# Altium PCB 8266HomeKitSwitch.PcbDoc
Units mm, origin at the board's own origin, x right, y up, seen from the top; angles counter-clockwise.
Board outline 40 x 45 mm, 2 copper layers (Top Layer, Bottom Layer); 19 components, 15 nets, 79 pads, 100 vias.
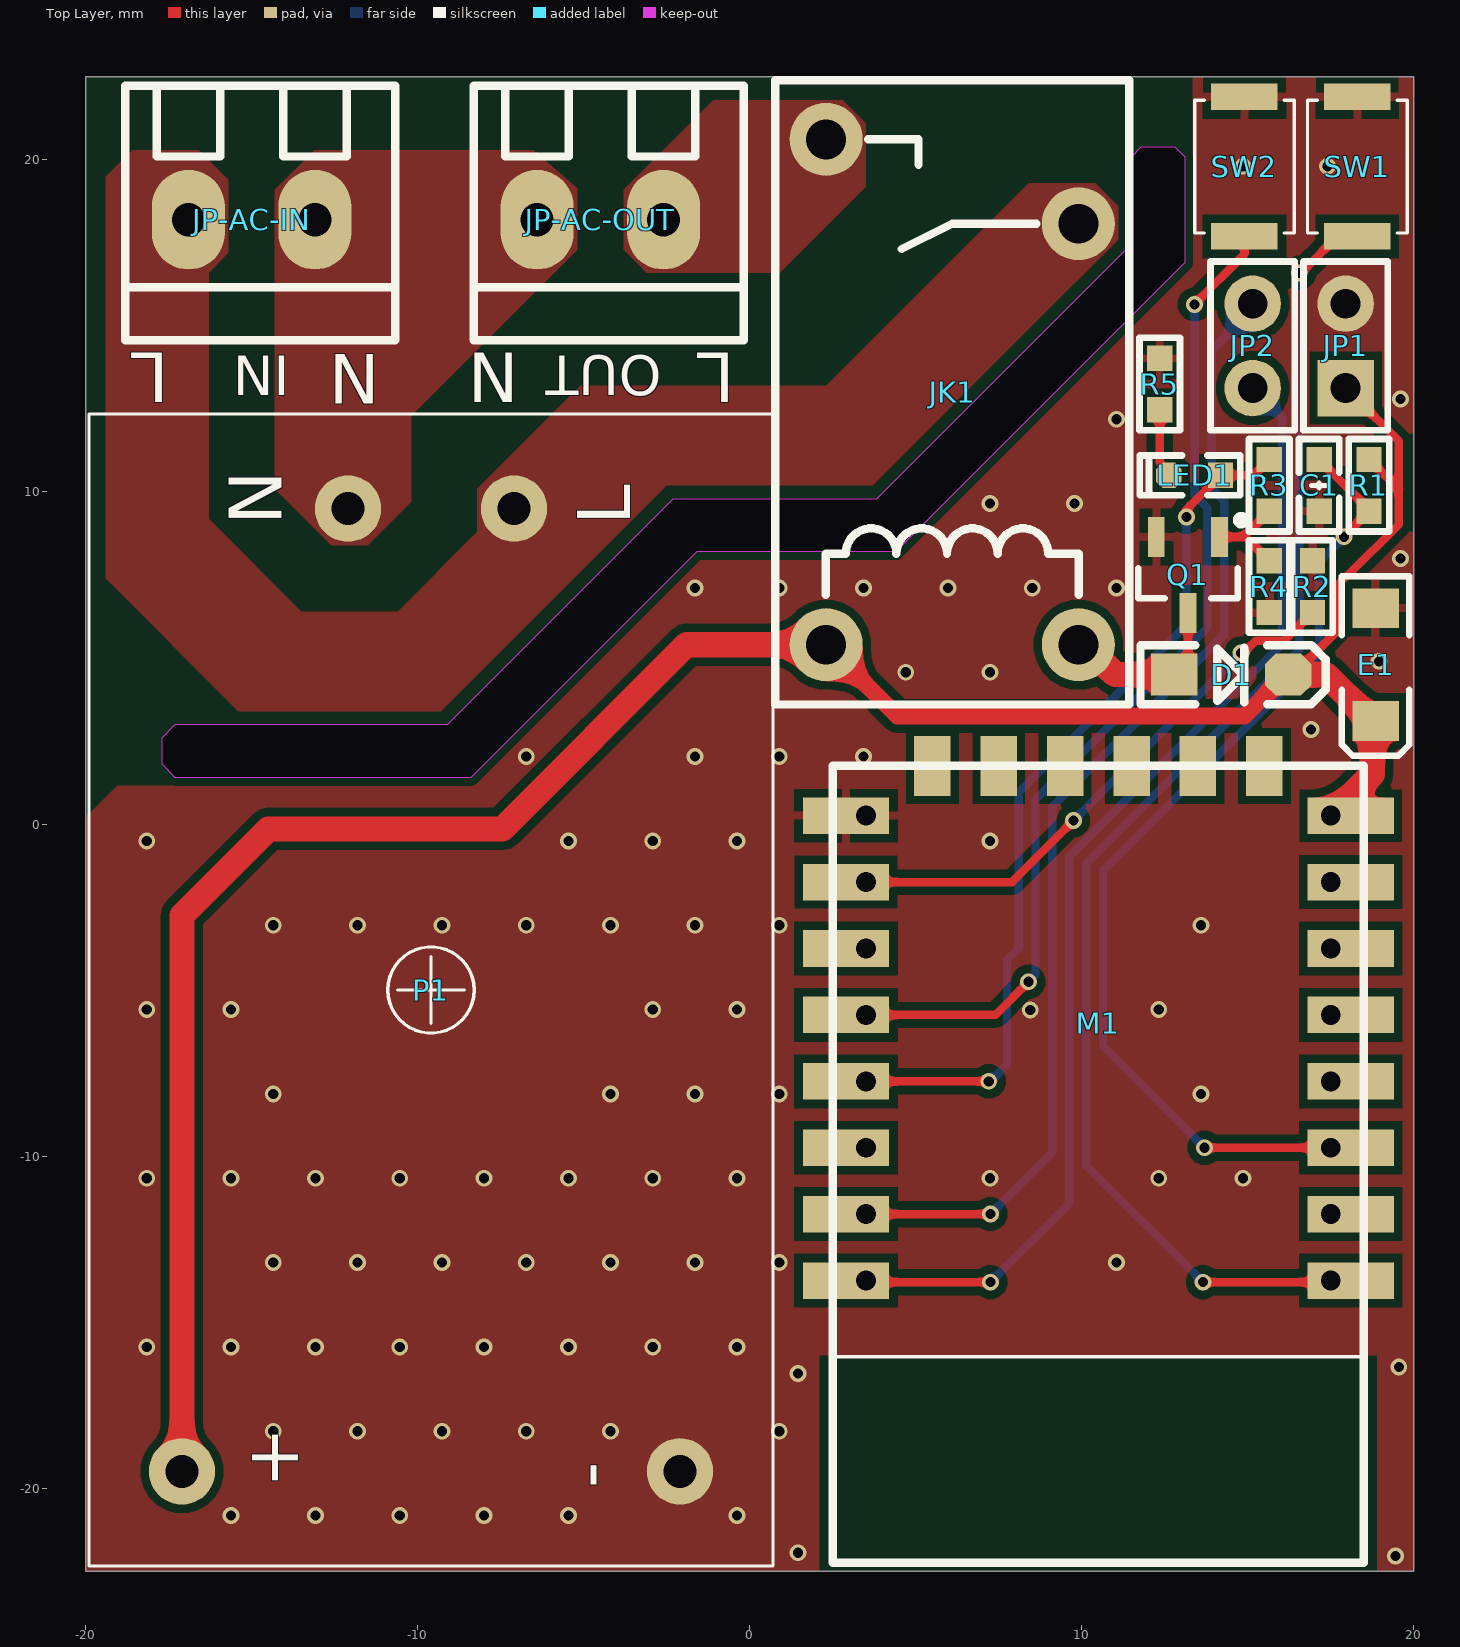
[diagram p0: Top Layer view]
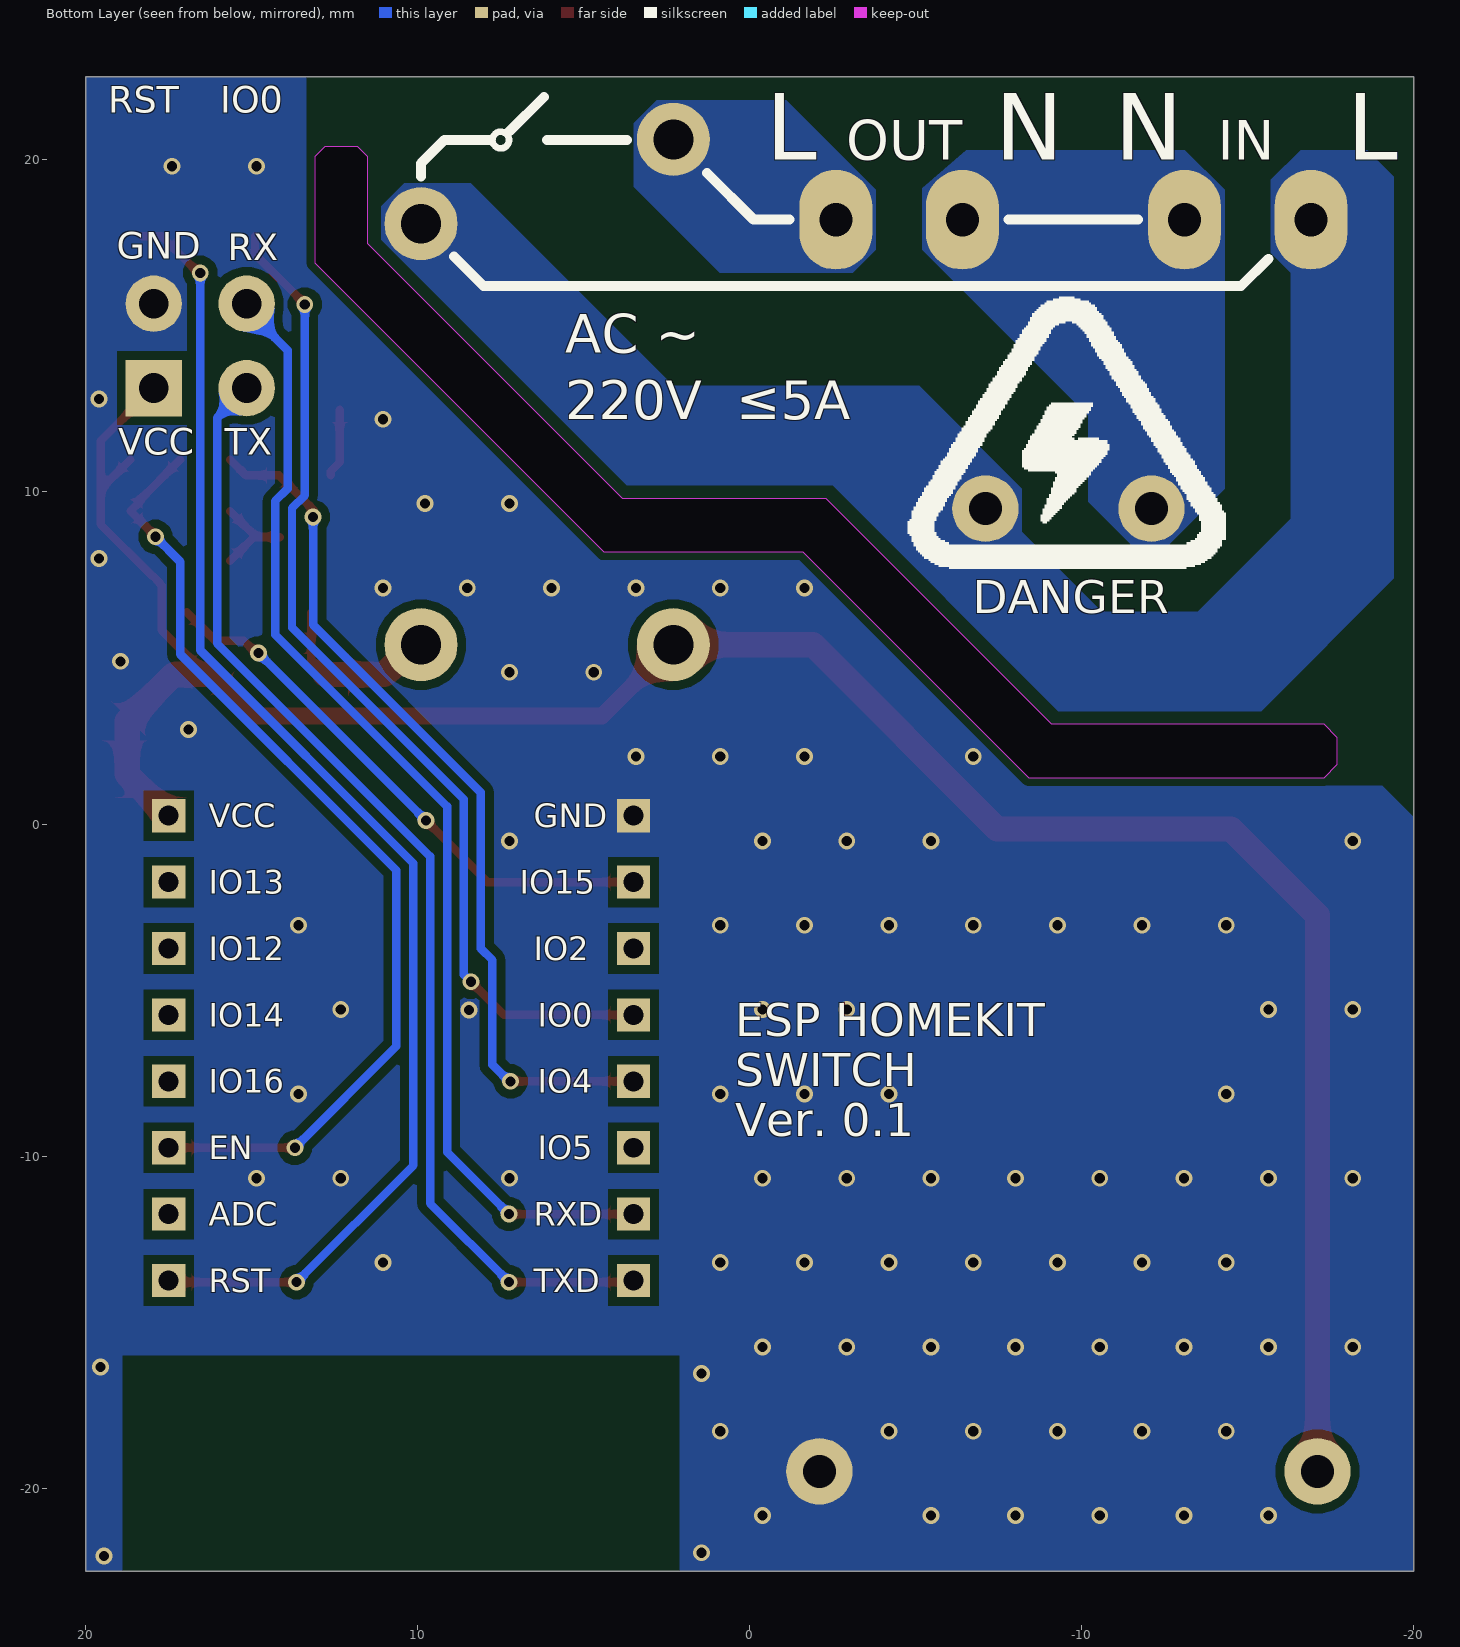
[diagram p1: Bottom Layer view, seen from below]

## Layer stack, top to bottom
Top Solder: solder mask 0.0102, Solder Resist, Dk 3.5
Top Layer: signal copper 0.0356
Dielectric 1: dielectric 0.32, FR-4, Dk 4.8
Bottom Layer: signal copper 0.0356
Bottom Solder: solder mask 0.0102, Solder Resist, Dk 3.5

## Board outline
-20,-22.5 -20,22.5 20,22.5 20,-22.5
cut-out: -17.3,1.4 -17.7,1.8 -17.7,2.6 -17.3,3 -9.1,3 -2.3,9.8 3.831,9.8 11.5,17.469 11.5,20.1 11.8,20.4 12.8,20.4 13.1,20.1 13.1,16.9 4.4,8.2 -1.6,8.2 -8.4,1.4

## Design rules (kind name [scope] priority, off if disabled: settings)
Clearance [All] p1: gap=0.254 ignorepadtopadclearanceinfootprint=FALSE except(0: Arc-Hole Track-Hole SMDPad-Hole THPad-Hole Via-Hole Fill-Hole Poly-Hole Region-Hole Text-Hole)
PolygonConnect [All] p1: thpad.connectstyle=Direct thpad.reliefconductorwidth=0.254 thpad.reliefentries=4 thpad.polygonreliefangle="90 Angle" thpad.airgapwidth=0.254 smdpad.connectstyle=Relief smdpad.reliefconductorwidth=0.254 smdpad.reliefentries=4 smdpad.polygonreliefangle="90 Angle" smdpad.airgapwidth=0.254 via.connectstyle=Direct via.reliefconductorwidth=0.254 via.reliefentries=4 via.polygonreliefangle="90 Angle" via.airgapwidth=0.254
RoutingVias [All] p1: holewidth=0.711 width=1.27 viastyle="Through Hole" minholewidth=0.305 minwidth=0.508 maxholewidth=0.305 maxwidth=0.508
SolderMaskExpansion [All] p1: expansion=0.102 istentingtop=FALSE
Width [All] p1: maxlimit=12.7 minlimit=0.254 preferedwidth=0.254
30 further rules are at their usual default settings.

## Components (designator, comment, footprint, x,y, rotation, side; value= is the part's Value field where it differs from the comment)
C1 "104" "C 0603_L" 17.15,10.2 r90 top
D1 "1N4007" SOD-123 14.5,4.5 r0 top
E1 "100uF/6.3V" "CD A(3216)" 18.85,4.8 r90 top
JK1 "HF32F/5-HS" JZC-32F_1H 6.1,13 r90 top locked
JP1 "HDR-1X2" HDR2.54-LI-2P#1 17.95,14.4 r270 top
JP2 "HDR-1X2" HDR2.54-LI-2P#2 15.15,14.4 r90 top
JP-AC-IN "HDR-1X2" KF128-3.81-2P -15,18.2 r180 top
JP-AC-OUT "HDR-1X2" KF128-3.81-2P -4.5,18.2 r180 top
LED1 "红色" "LED 0603B" 13.4,10.5 r180 top locked
M1 "ESP-12E&F Module" "ESP-12E&F MODULE" 10.5,-6 r180 top locked
P1 "ACDCPower" ADDC -9.6,-5 r90 top locked
Q1 "SS8050" SOT23-3N 13.2,7.5 r180 top
R1 "10K" "R 0603_L" 18.65,10.2 r90 top
R2 "10K" "R 0603_L" 16.95,7.15 r270 top
R3 "4.7K" "R 0603_L" 15.65,10.2 r90 top
R4 "10K" "R 0603_L" 15.65,7.15 r270 top
R5 "1K" "R 0603_L" 12.35,13.25 r270 top
SW1 "3x4x5" TS3x4x2 18.3,19.8 r0 top
SW2 "3x4x5" TS3x4x2 14.9,19.8 r180 top

## Footprints (in the part's own frame and the unit in brackets; to place one, negate y for a bottom-side part, rotate by r counter-clockwise, add the part's x,y. Pads: shape width x height; smd on the part's side, far side on the other; paste and mask are expansions set on the pad)
ADDC [mm]
  round 2 hole 1: 1(14.5,-2.5) 2(14.5,2.5) 3(-14.5,-7.5) 4(-14.5,7.5)
  silkscreen extent -17.35,-10.3 17.35,10.3, body extent -17.35,-10.3 17.35,10.3, height 15.5
"C 0603_L" [mil] "无极性贴片电容"
  rect 30x30 smd: 1(-30.59,0) 2(30.59,0)
  silkscreen extent -55,-24 55,24, body extent -31,-16 31,16, height 32
"CD A(3216)" [mm] "长3.2mm，宽1.6mm，厚1.6mm"
  rect 1.2x1.4 smd: 1(-1.7,0) 2(1.7,0)
  silkscreen extent -2.74,-1.02 2.67,1.02, body extent -1.6,-0.8 1.6,0.8, height 1.6
"ESP-12E&F MODULE" [mm]
  rect 2.6x1.1 smd: 1(-7.6,7.75) 2(-7.6,5.75) 3(-7.6,3.75) 4(-7.6,1.75) 5(-7.6,-0.25) 6(-7.6,-2.25) 7(-7.6,-4.25) 8(-7.6,-6.25) 15(7.6,-6.25) 16(7.6,-4.25) 17(7.6,-2.25) 18(7.6,-0.25) 19(7.6,1.75) 20(7.6,3.75) 21(7.6,5.75) 22(7.6,7.75)
  rect 1x1 hole 0.6: 1(-7,7.75) 7(-7,-4.25)
  rect 0.762x1 / inner rect 0.762x1 / far side rect 1x1 hole 0.6: 2(-7,5.75) 3(-7,3.75) 4(-7,1.75) 5(-7,-0.25) 6(-7,-2.25) 8(-7,-6.25) 15(7,-6.25) 16(7,-4.25) 17(7,-2.25) 18(7,-0.25) 19(7,1.75) 20(7,3.75) 21(7,5.75) 22(7,7.75)
  rect 1.1x1.8 smd: 9(-5,-7.75) 10(-3,-7.75) 11(-1,-7.75) 12(1,-7.75) 13(3,-7.75) 14(5,-7.75)
  silkscreen extent -8,-7.75 8,16.25
HDR2.54-LI-2P#1 [mm] "排针，2脚"
  round 1.7 hole 0.9: 1(-1.27,0)
  rect 1.7x1.7 hole 0.9: 2(1.27,0)
  silkscreen extent -2.54,-1.27 2.54,1.27, body extent -2.54,-1.27 2.54,1.27, height 8.5
HDR2.54-LI-2P#2 [mm] "排针，2脚"
  round 1.7 hole 0.9: 1(-1.27,0) 2(1.27,0)
  silkscreen extent -2.54,-1.27 2.54,1.27, body extent -2.54,-1.27 2.54,1.27, height 8.5
JZC-32F_1H [mm] "单刀常开,长：18.4mm，宽：10.2mm，高：15.3mm"
  round 2.2 hole 1.2: 1(-7.6,-3.8) 2(5.08,-3.8) 3(7.62,3.8) 5(-7.6,3.8)
  silkscreen extent -9.4,-5.33 9.4,5.33, body extent -9.2,-5.1 9.2,5.1, height 15.75
KF128-3.81-2P [mm] "螺钉式接线端子，脚距3.81mm"
  oval 2.2x3 hole 1: 1(-1.905,0) 2(1.905,0)
  silkscreen extent -4.32,-4.04 3.81,3.63, body extent -4.31,-3.9 3.81,3.5, height 8.55
"LED 0603B" [mil] "蓝色0603LED"
  rect 30x30 smd: 1(-30.59,0)
  oct 30x30 smd: 2(30.59,0)
  silkscreen extent -54,-24 65,24, body extent -31,-16 32,16, height 24
"R 0603_L" [mil] "1/10W贴片电阻"
  rect 30x30 smd: 1(-30.59,0) 2(30.59,0)
  silkscreen extent -55,-24 55,24, body extent -31,-16 32,16, height 16
SOD-123 [mil] "2.7x1.6X1.1mm（长宽高，不包括引脚）"
  rect 55x50 smd: 1(-67.5,0)
  oct 55x50 smd: 2(67.5,0)
  silkscreen extent -108,-35 112,35, body extent -73,-31 73,31, height 48
SOT23-3N [mm] "3x1.3x1mm(长宽高)"
  rect 0.5x1.2 smd: 1(-0.95,-1.143) 2(0.95,-1.143) 3(0,1.143)
  silkscreen extent -1.73,-1.78 1.5,0.7, body extent -1.5,-1.2 1.5,1.2, height 1.05
TS3x4x2 [mm] "防水轻触开关3x4x2"
  rect 2x0.8 smd: 1(0,2.1) 2(0,-2.1)
  silkscreen extent -1.5,-2 1.5,2

## Part data
C1: library part C, "无极性贴片电容", BOM名称=无极性贴片电容, 学习资源=www.ooocke.com, 材质=X7R, 版权归属=源创客
D1: "整流二极管", BOM名称=整流二极管, 学习资源=www.ooocke.com, 版权归属=源创客
E1: library part C-CD, "贴片钽电容", BOM名称=贴片钽电容, 学习资源=www.ooocke.com, 版权归属=源创客
JK1: "5V一组常开", BOM名称=5V继电器, 学习资源=www.ooocke.com, 版权归属=源创客
JP1 JP2 JP-AC-IN JP-AC-OUT: library part "Header 2", "2P接插件", BOM名称=2P接插件, 学习资源=www.ooocke.com, 版权归属=源创客
LED1: library part LED-SMD, "贴片LED", BOM名称=贴片LED, 学习资源=www.ooocke.com, 版权归属=源创客
Q1: library part 8050-SMD, "高频放大-NPN型", BOM名称=高频放大-NPN型, 学习资源=www.ooocke.com, 属性="40V 1.5A 1W 100MHZ", 版权归属=源创客
R1 R2 R3 R4 R5: library part R, "贴片电阻", BOM名称=贴片电阻, 学习资源=www.ooocke.com, 版权归属=源创客
SW1 SW2: library part "TS 3x4", "3x4轻触开关", BOM名称=3x6轻触开关, 学习资源=www.ooocke.com, 版权归属=源创客

## Via types
v1: diameter 0.508, hole 0.305, Top Layer to Bottom Layer, tented both sides, 94 vias
v2: diameter 0.508, hole 0.305, Top Layer to Bottom Layer, 6 vias

## Nets (pads, with @x,y where several pads share a name; then routed paths per layer and width w, separated by ;. In a path a pad name is that pad's centre, name@x,y a point inside that pad or via, vN(x,y) a via of type N, cw(c..) or ccw(c..) an arc to the next point about the centre after c; other vN are vias at no path point)
ESPRX: JP2.2 M1.21 | length 34.8
  Top Layer w0.254: M1.21@3.5,-11.75 v1(7.25,-11.75)
  Bottom Layer w0.254: v1(7.25,-11.75) 9.116,-9.884 9.116,0.529 14.293,5.706 14.293,9.723 13.919,10.097 13.919,14.269 15.15,15.5 JP2.2
ESPTX: JP2.1 M1.22 | length 34.7
  Top Layer w0.254: M1.22@3.5,-13.75 3.55,-13.8 v1(7.25,-13.8)
  Bottom Layer w0.254: v1(7.25,-13.8) 9.624,-11.426 9.624,-0.976 16.042,5.442 16.042,12.238 JP2.1
GND: C1.1 E1.2 JP1.1 M1.15 P1.3 Q1.2 R2.1 R4.2 R5.1 SW1.1 SW2.2
  other v1: 19.45,-22.05 1.45,-21.95 -15.621,-20.828 -13.081,-20.828 -10.541,-20.828 -8.001,-20.828 -5.461,-20.828 -0.381,-20.828 -14.351,-18.288 -11.811,-18.288 -9.271,-18.288 -6.731,-18.288 -4.191,-18.288 0.889,-18.288 1.45,-16.55 19.55,-16.35 -18.161,-15.748 -15.621,-15.748 -13.081,-15.748 -10.541,-15.748 -8.001,-15.748 -5.461,-15.748 -2.921,-15.748 -0.381,-15.748 -14.351,-13.208 -11.811,-13.208 -9.271,-13.208 -6.731,-13.208 -4.191,-13.208 -1.651,-13.208 0.889,-13.208 11.049,-13.208 -18.161,-10.668 -15.621,-10.668 -13.081,-10.668 -10.541,-10.668 -8.001,-10.668 -5.461,-10.668 -2.921,-10.668 -0.381,-10.668 7.239,-10.668 12.319,-10.668 14.859,-10.668 -14.351,-8.128 -4.191,-8.128 -1.651,-8.128 0.889,-8.128 13.589,-8.128 -18.161,-5.588 -15.621,-5.588 -2.921,-5.588 -0.381,-5.588 12.319,-5.588 -14.351,-3.048 -11.811,-3.048 -9.271,-3.048 -6.731,-3.048 -4.191,-3.048 -1.651,-3.048 0.889,-3.048 13.589,-3.048 -18.161,-0.508 -5.461,-0.508 -2.921,-0.508 -0.381,-0.508 7.239,-0.508 -6.731,2.032 -1.651,2.032 0.889,2.032 3.429,2.032 4.699,4.572 7.239,4.572 -1.651,7.112 0.889,7.112 3.429,7.112 5.969,7.112 8.509,7.112 11.049,7.112 7.239,9.652 9.779,9.652 11.049,12.192 14.859,19.812 17.399,19.812
  other v2: 8.45,-5.6 16.9,2.85 18.95,4.9 19.6,8 19.6,12.8
IO4: LED1.1 M1.19 R3.2 | length 26.5
  Top Layer w0.254: M1.19@3.5,-7.75 v2(7.2,-7.75) ; v1(13.15,9.25) 13.15,9.473 LED1.1 15.173,10.5 R3.2
  Bottom Layer w0.254: v2(7.2,-7.75) 7.25,-7.75 7.75,-7.25 7.75,-4.1 8.1,-3.75 8.1,0.95 13.15,6 v1(13.15,9.25)
NetC1_2: C1.2 M1.3 R1.1 | length 29.7
  Top Layer w0.254: v1(13.7,-9.75) M1.3@17.5,-9.75 ; C1.2 18.396,9.731 18.396,9.677 R1.1 17.9,8.673 v1(17.9,8.65)
  Bottom Layer w0.254: v1(13.7,-9.75) 10.64,-6.69 10.64,-1.397 17.15,5.113 17.15,7.9 v1(17.9,8.65)
NetD1_1: D1.1 JK1.1 Q1.3 | length 5.3
  Top Layer w0.254: D1.1 13.2,4.915 Q1.3
  Top Layer w0.762: JK1.1 10.111,5.4 11.011,4.5 D1.1
NetJK1_2: JK1.2 JP-AC-IN.2 P1.1
NetJK1_3: JK1.3 JP-AC-OUT.1
NetJP-AC-IN_1: JP-AC-IN.1 JP-AC-OUT.2 P1.2
NetLED1_2: LED1.2 R5.2 | length 2.1
  Top Layer w0.254: R5.2 12.35,10.889 12.623,10.616 LED1.2
NetM1_1: M1.1 SW1.2 | length 40.6
  Top Layer w0.254: v1(13.65,-13.8) 17.45,-13.8 M1.1@17.5,-13.75 ; v1(16.55,16.6) 16.6,16.6 17.7,17.7 SW1.2
  Bottom Layer w0.254: v1(13.65,-13.8) 10.132,-10.282 10.132,-1.186 16.55,5.232 v1(16.55,16.6)
NetM1_16: M1.16 R2.2 | length 16.8
  Top Layer w0.254: M1.16@3.5,-1.75 7.901,-1.75 v1(9.751,0.1) ; v1(14.8,5.15) 14.869,5.15 15.235,5.516 16.094,5.516 16.412,5.834 R2.2
  Bottom Layer w0.254: v1@9.751,0.1 v1@14.8,5.149
NetM1_18: M1.18 SW2.1 | length 30.8
  Top Layer w0.254: M1.18@3.5,-5.75 7.4,-5.75 v1(8.4,-4.75) ; v1(13.4,15.65) 13.4,15.661 14.9,17.161 SW2.1
  Bottom Layer w0.254: v1(8.4,-4.75) 8.608,-4.542 8.608,0.74 13.785,5.917 13.785,9.513 13.4,9.898 v1(13.4,15.65)
NetQ1_1: Q1.1 R3.1 R4.1 | length 2.9
  Top Layer w0.254: Q1.1 14.87,8.643 ; R4.1 14.934,8.643 14.87,8.643 ; R3.1 14.87,8.643
VCC3V3: D1.2 E1.1 JK1.5 JP1.2 M1.8 P1.4 R1.2 | length 73.3
  Top Layer w0.254: D1.2 16.378,4.5 17.712,5.834 17.712,7.184 17.769,7.241 17.769,7.258 17.992,7.481 18.009,7.481 19.55,9.022 19.55,10.077 ; JP1.2 19.55,11.53 19.55,10.077 ; R1.2 19.55,10.077
  Top Layer w0.508: JK1.5 4.45,3.25 14.901,3.25 16.151,4.5 D1.2
  Top Layer w0.762: P1.4 -17.1,-2.75 -14.5,-0.15 -7.45,-0.15 -1.9,5.4 JK1.5 ; D1.2@16.378,4.5 17.35,4.5 18.75,3.1 18.75,1.5 17.619,0.369 17.5,0.369 M1.8@17.5,0.25
pads on no net: M1.2 M1.4 M1.5 M1.6 M1.7 M1.9 M1.10 M1.11 M1.12 M1.13 M1.14 M1.17 M1.20
copper on no net: | length 0.1
  Top Layer w0.254: 3.5,-3.75 3.55,-3.7

## Polygon pours and split planes (outlines as drawn)
GND on Top Layer "GND_L01_P006" (solid, pour order 6): 13.35,22.5 20,22.5 20,-22.5 -20,-22.5 -20,0.2 -19.05,1.15 -8.65,1.15 -1.6,8.2 4.4,8.2 13.35,17.15
NetJK1_3 on Top Layer "NETJK1_3_L01_P002" (solid, pour order 2): -3.8,19.1 -1.1,21.8 2.8,21.8 3.5,21.1 3.5,19.2 0.9,16.6 -3.1,16.6 -3.8,17.3 -3.8,17.8
NetJK1_2 on Top Layer "NETJK1_2_L01_P001" (solid, pour order 1): -18.6,20.3 -19.4,19.5 -19.4,7.4 -15.4,3.4 -9.3,3.4 -2.5,10.2 3.7,10.2 8.5,15 11.1,17.6 11.1,18.6 10.4,19.3 8.4,19.3 2.3,13.2 -5.1,13.2 -8.2,10.1 -8.2,8.8 -10.6,6.4 -13.5,6.4 -16.3,9.2 -16.3,16.6 -15.7,17.2 -15.7,19.4 -16.6,20.3
NetJP-AC-IN_1 on Top Layer "NETJP-AC-IN_1_L01_P000" (solid, pour order 0): -6.514,20.3 -13.1,20.3 -14.3,19.1 -14.3,10.1 -12.6,8.4 -11.5,8.4 -10.2,9.7 -10.2,12.3 -5.2,17.3 -5.2,19.15
GND on Bottom Layer "GND_L02_P007" (solid, pour order 7): 13.35,22.5 20,22.5 20,-22.5 -20,-22.5 -20,0.2 -19.05,1.15 -8.65,1.15 -1.6,8.2 4.4,8.2 13.35,17.15
NetJK1_3 on Bottom Layer "NETJK1_3_L02_P005" (solid, pour order 5): -3.8,19.1 -1.1,21.8 2.8,21.8 3.5,21.1 3.5,19.2 0.9,16.6 -3.1,16.6 -3.8,17.3 -3.8,17.8
NetJP-AC-IN_1 on Bottom Layer "NETJP-AC-IN_1_L02_P004" (solid, pour order 4): -6.514,20.3 -13.1,20.3 -14.3,19.1 -14.3,10.1 -12.6,8.4 -11.5,8.4 -10.2,9.7 -10.2,12.3 -5.2,17.3 -5.2,19.15
NetJK1_2 on Bottom Layer "NETJK1_2_L02_P003" (solid, pour order 3): -18.6,20.3 -19.4,19.5 -19.4,7.4 -15.4,3.4 -9.3,3.4 -2.5,10.2 3.7,10.2 8.5,15 11.1,17.6 11.1,18.6 10.4,19.3 8.4,19.3 2.3,13.2 -5.1,13.2 -8.2,10.1 -8.2,8.8 -10.6,6.4 -13.5,6.4 -16.3,9.2 -16.3,16.6 -15.7,17.2 -15.7,19.4 -16.6,20.3

## Other copper
Top Layer:
  pour cut-out: 2.1,-16 18.9,-16 18.9,-22.9 2.1,-22.9
Bottom Layer:
  pour cut-out: 2.1,-16 18.9,-16 18.9,-22.9 2.1,-22.9

## Silkscreen, mask and mechanical layers (free items; w line width, h text height)
Top Overlay:
  text "L" at -17.5,14.2 h1.5 r180
  text "N" at -6.95,14.2 h1.5 r180
  text "L" at -0.45,14.2 h1.5 r180
  text "N" at -11.15,14.15 h1.5 r180
  text "IN" at -13.85,14.1 h1.2 r180
  text "OUT" at -2.651,14.1 h1.2 r180
Bottom Overlay:
  drawing of 14 lines, arcs and shapes, not listed
  text "IO0" at 15.95,21.427 h0.8
  text "RST" at 19.316,21.427 h0.8
  text "L" at -18,20 h2
  text "IN" at -14.1,20 h1.2
  text "N" at -11,20 h2
  text "N" at -7.4,20 h2
  text "OUT" at -2.901,20 h1.2
  text "L" at -0.5,20 h2
  text "GND" at 19.066,17.027 h0.8
  text "RX" at 15.716,16.977 h0.8
  text "AC ~ / 220V  ≤5A" at 5.554,11.8 h2
  text "TX" at 15.816,11.127 h0.8
  text "VCC" at 19.016,11.127 h0.8
  text "DANGER" at -6.718,6.35 h1
  text "GND" at 6.5,-0.1 h0.7
  text "VCC" at 16.3,-0.1 h0.7
  text "IO15" at 6.933,-2.1 h0.7
  text "IO13" at 16.3,-2.1 h0.7
  text "IO2" at 6.5,-4.1 h0.7
  text "IO12" at 16.3,-4.1 h0.7
  text "IO0" at 6.383,-6.1 h0.7
  text "IO14" at 16.3,-6.1 h0.7
  text "IO4" at 6.383,-8.1 h0.7
  text "IO16" at 16.3,-8.1 h0.7
  text "ESP HOMEKIT / SWITCH / Ver. 0.1" at 0.43,-9.4 h1
  text "IO5" at 6.383,-10.1 h0.7
  text "EN" at 16.3,-10.1 h0.7
  text "RXD" at 6.5,-12.1 h0.7
  text "ADC" at 16.3,-12.1 h0.7
  text "TXD" at 6.5,-14.1 h0.7
  text "RST" at 16.3,-14.1 h0.7
Mechanical 1:
  lines w0.1: -20,-22.5 20,-22.5 20,22.5 -20,22.5 -20,-22.5 ; -17.7,1.8 -17.3,1.4 -8.4,1.4 -1.6,8.2 4.4,8.2 13.1,16.9 13.1,20.1 12.8,20.4 11.8,20.4 11.5,20.1 11.5,17.469 3.831,9.8 -2.3,9.8 -9.1,3 -17.3,3 -17.7,2.6 -17.7,1.8

## Text inside footprints (layer, text, board x,y; h text height)
P1: Top Overlay "+" at -13.6,-20 h1.6 r90; Top Overlay "-" at -4.1,-20 h1.6 r90; Top Overlay "N" at -14.1,9 h1.6 r90; Top Overlay "L" at -3.6,9 h1.6 r90